# EAGLE board main (EAGLE 6.5.0)

Size 100 x 80 mm. Coordinates in mm from the lower left corner, seen from the top.
Outline: 0,0 100,0 100,80 0,80 0,0
Copper layers (1*16): Top 0.035mm / dielectric 1.5mm / Bottom 0.035mm
Design rules "default": minimum track width 10mil, minimum drill 24mil, track to track 8mil, track to pad 8mil, pad to pad 8mil, via to via 8mil, smd to smd 8mil, copper to edge 40mil, drill to drill 8mil, minimum pad ring 10mil, minimum via ring 8mil, stop-mask expansion 4mil, vias tented up to drill 0mil, thermal gap 10mil

## Footprints (pad centres in the part's own frame; a part is rotated, then mirrored left to right if it is on the bottom)
22-23-2021 = drill 1 long: 1 -1.27,0; 2 1.27,0
SMD4-7 = smd 1.78 x 1.55: 1 -1.27,-4.77; 2 1.27,-4.77; 3 1.27,4.77; 4 -1.27,4.77
R0603 = smd 1 x 1.1: 1 -0.85,0; 2 0.85,0
SOT95P280X145-6N = smd 1.27 x 0.559: 1 -1.295,0.94; 2 -1.295,0; 3 -1.295,-0.94; 4 1.295,-0.94; 5 1.295,0; 6 1.295,0.94
SOT23 = smd 1 x 1.4: 1 -0.95,-1.1; 2 0.95,-1.1; 3 0,1.1

## Placement (x,y rotation side)
MOTOR  [22-23-2021]  15.24,59.69 270 top
OK1  SFH618A-3X007  [SMD4-7]  53.34,58.42 0 bottom
R1  [R0603]  11.43,54.61 270 top
R2  [R0603]  19.05,54.61 90 top
R3  [R0603]  10.16,63.5 270 top
R4  [R0603]  7.62,63.5 90 top
U1  ATTINY10-TSHR  [SOT95P280X145-6N]  6.35,59.69 0 top
U$1  [SOT23]  15.24,54.61 0 top

## Library data of the parts
MOTOR = con-molex; MF: MOLEX; MPN: 22-23-2021; OC_FARNELL: 1462926; OC_NEWARK: 25C3832
OK1 = optocoupler; OC_FARNELL: unknown; OC_NEWARK: unknown
R1-R4 = rcl
U1 = Atmel_By_element14_Batch_1-00; MPN: ATTINY10-TSHR; OC_FARNELL: 1748538; OC_NEWARK: 26R5645; PACKAGE: SOT-23-6; SUPPLIER: Atmel
U$1 = transistor-fet

## Nets
+12V: MOTOR.1 OK1.4
AGND: R2.1 U$1.2
GND: U1.2
N$1: OK1.1 R3.1
N$2: OK1.2 U1.1
N$3: R1.2 R2.2 U$1.1
N$4: MOTOR.2 U$1.3
N$5: OK1.3 R1.1
N$6: R4.1 U1.6
SIG_USR: U1.4
VCC: R3.2 R4.2 U1.5

## Tracks (layer width: path | path; a pad name or v marks a point on that pad's centre or on a via)
+12V  (1 unrouted)
AGND  (1 unrouted)
N$1  (1 unrouted)
N$2  (1 unrouted)
N$3  (2 unrouted)
N$4  (1 unrouted)
N$5  (1 unrouted)
N$6  (1 unrouted)
VCC  (2 unrouted)